# Altium PCB SmartSensorMainPhase.PcbDoc
Units mil, origin at the board's own origin, x right, y up, seen from the top; angles counter-clockwise.
Board outline 2362.2 x 1496.06 mil, 3 copper layers (Top Layer, Mid-Layer 1, Bottom Layer); 69 components, 50 nets, 240 pads, 60 vias.
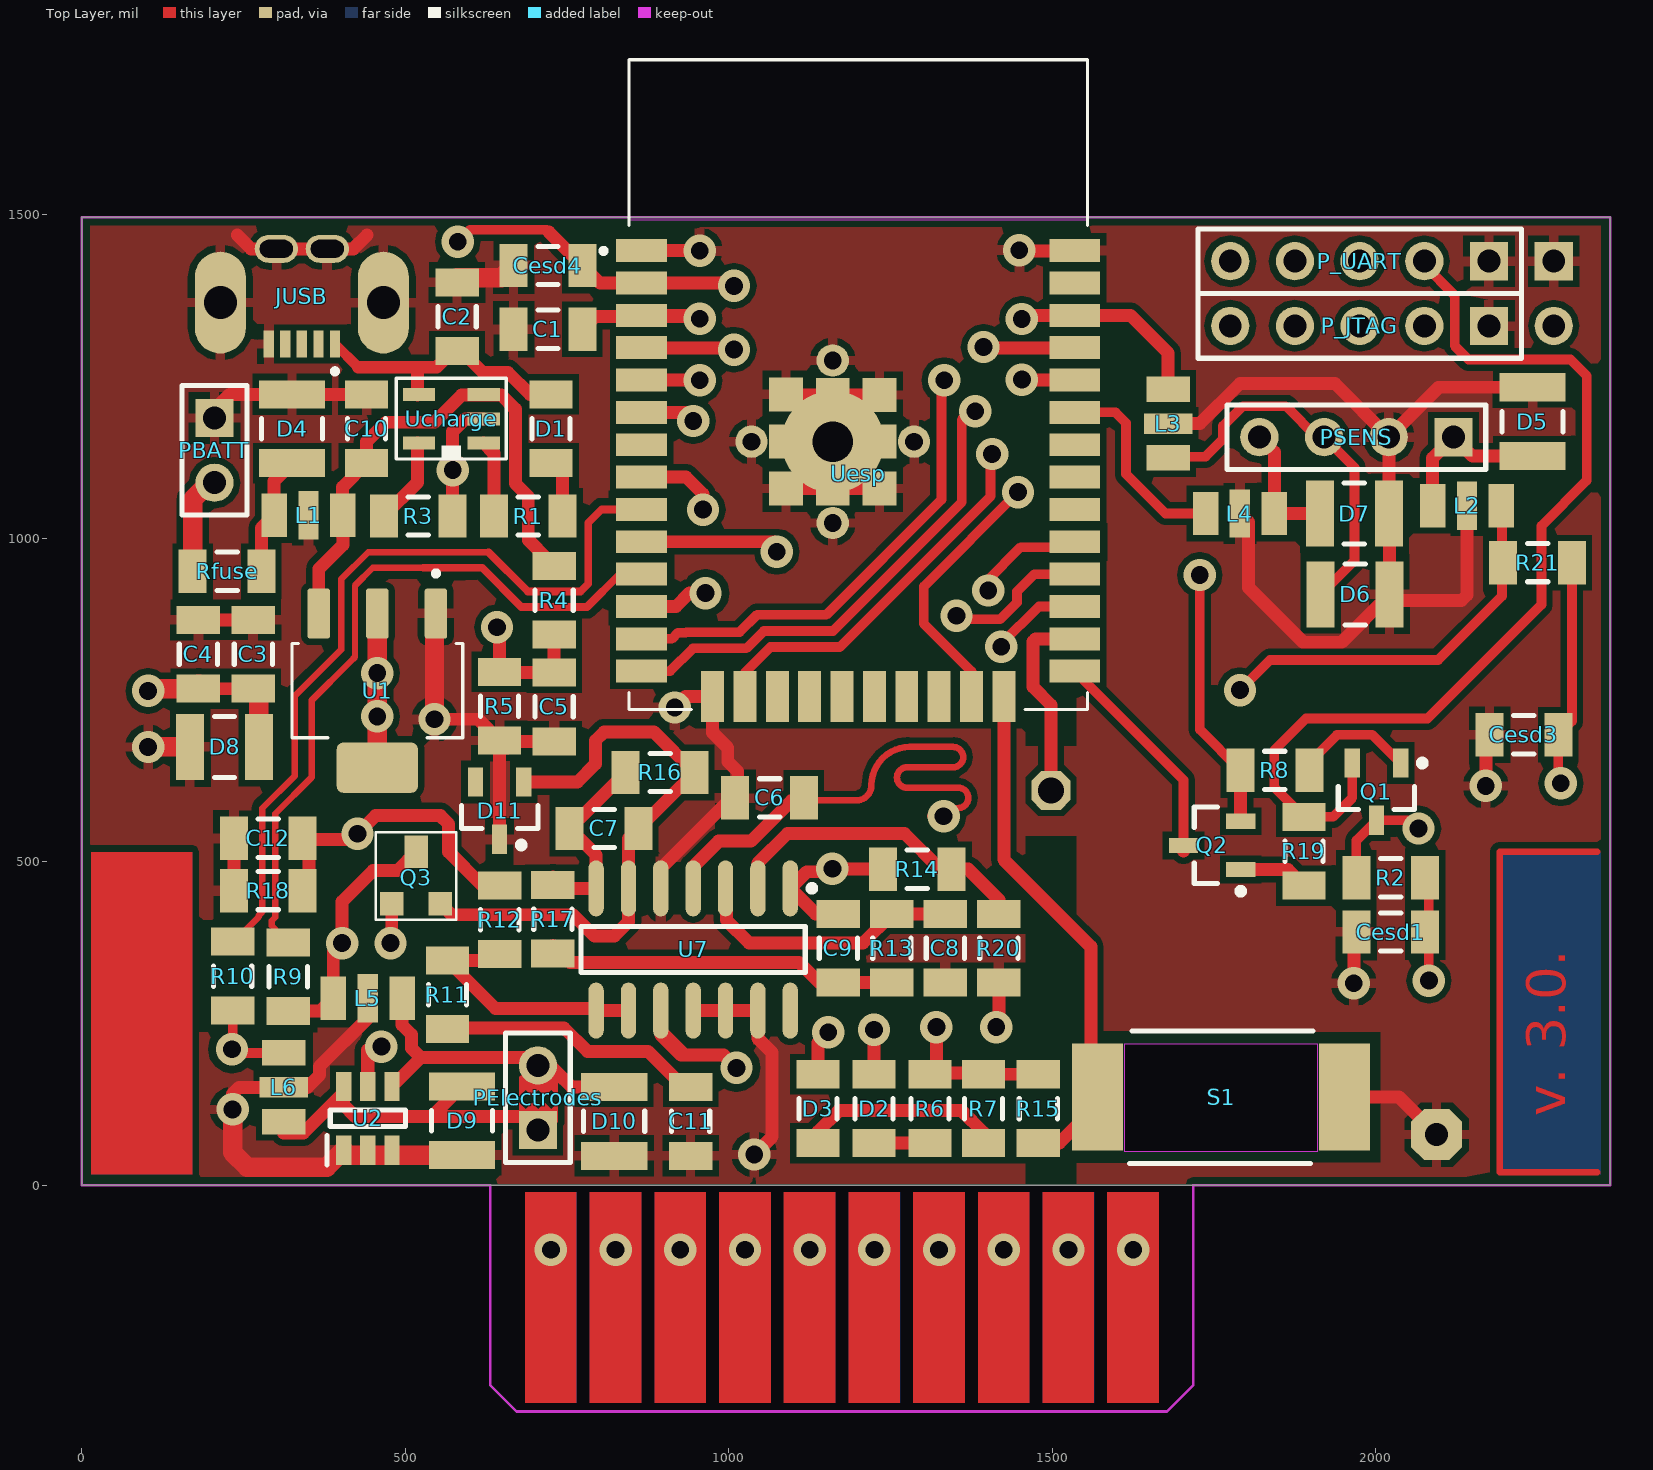
[diagram p0: Top Layer view]
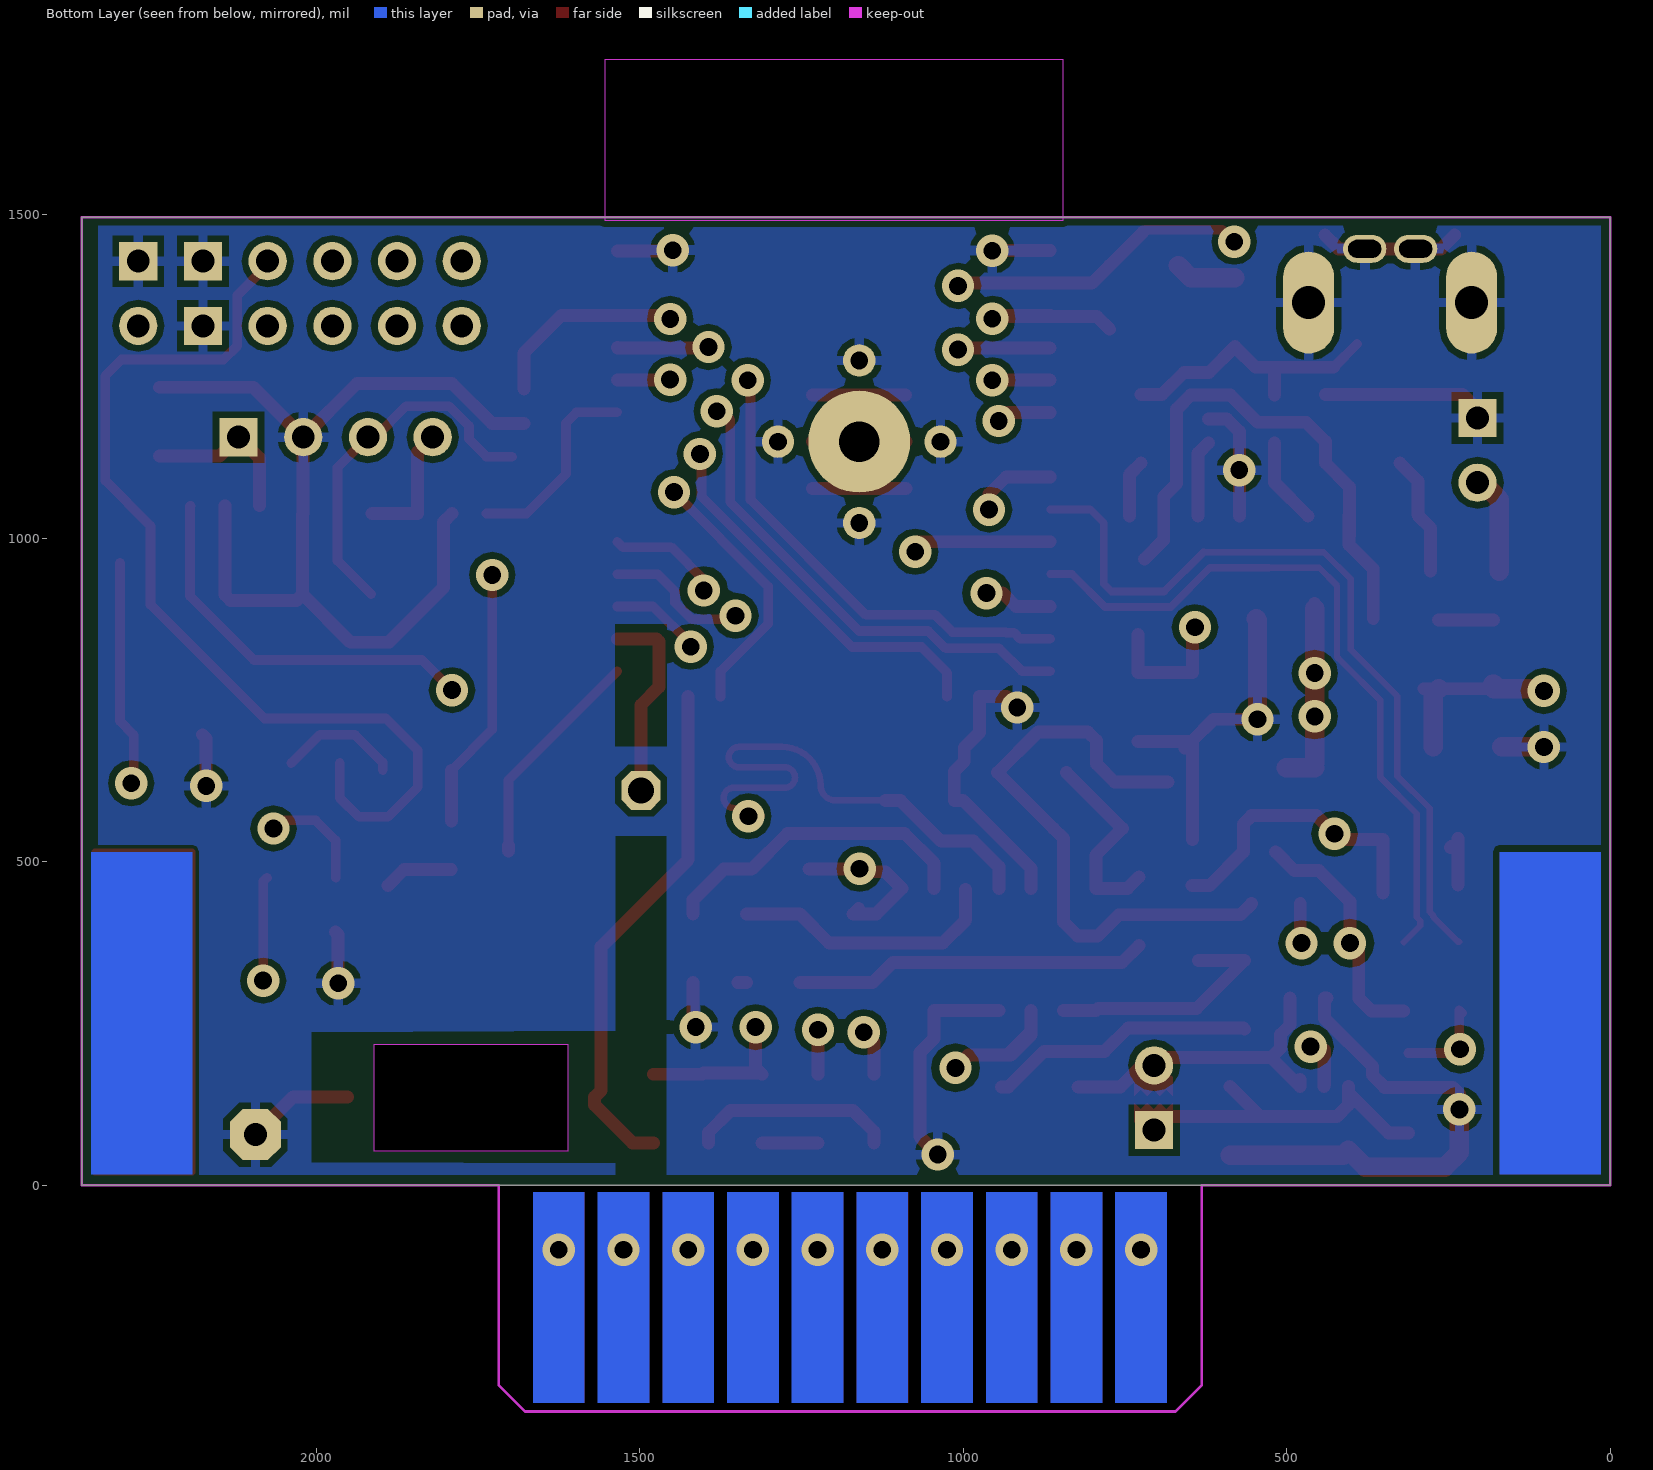
[diagram p1: Bottom Layer view, seen from below]
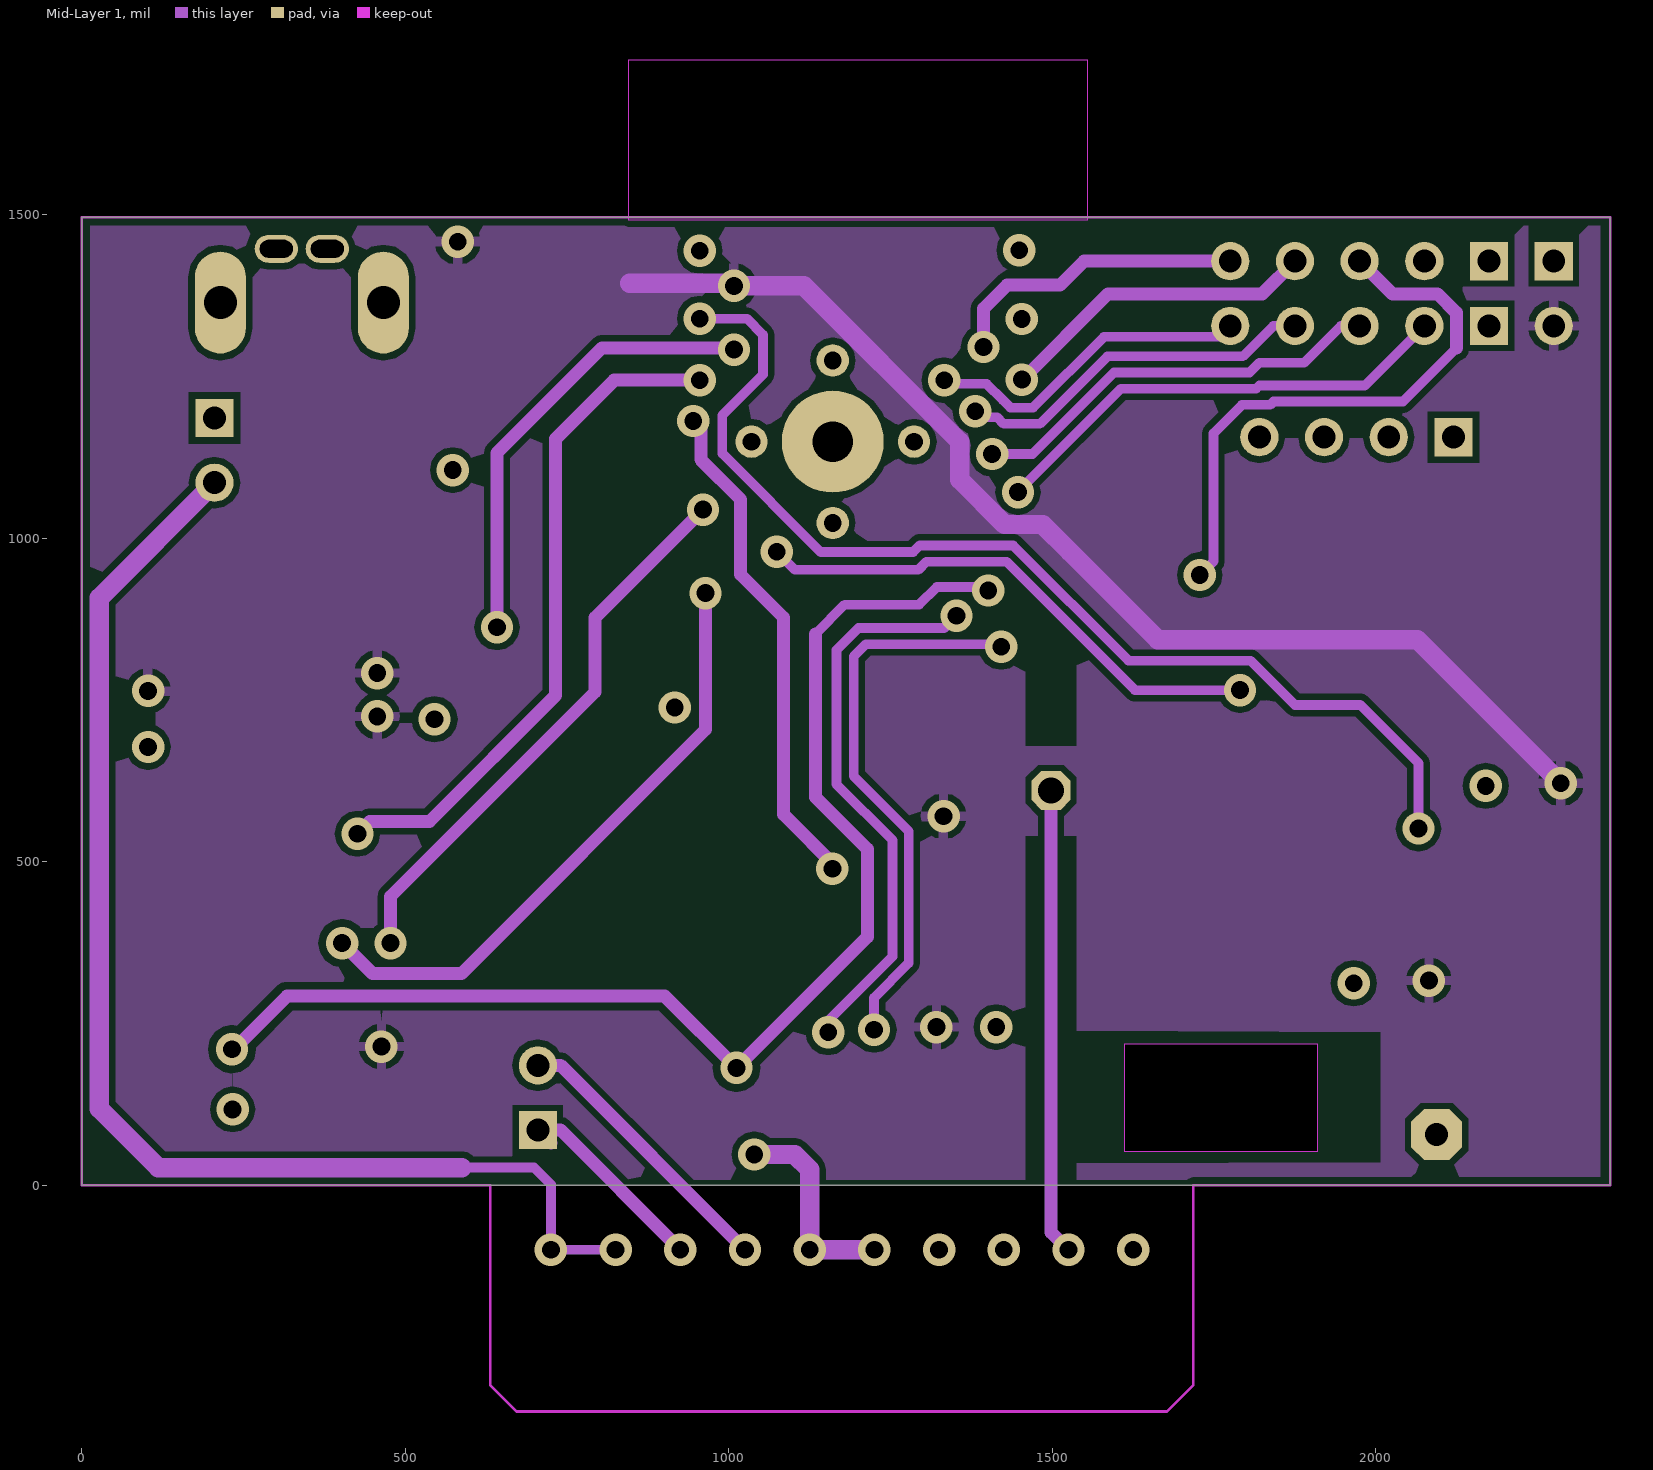
[diagram p2: Mid-Layer 1]

## Layer stack, top to bottom
Top Layer: signal copper 1.4
Dielectric: core 12.6, FR-4, Dk 4.8
Mid-Layer 1: signal copper 1.4
Dielectric: prepreg 12.6, FR-4, Dk 4.8
Bottom Layer: signal copper 1.4

## Board outline
0,0 2362.2,0 2362.2,1496.06 0,1496.06
cut-out: 1611.22,217.52 1611.22,52.17 1910.43,52.17 1910.43,217.52

## Design rules (kind name [scope] priority, off if disabled: settings)
Clearance Clearance_ACMM [(InNet('EL1') OR InNet('EL2') OR InNet('ACMM_VEL1') OR InNet('ACMM_VEL2')) vs NOT(InNet('EL1') OR InNet('EL2') OR InNet('ACMM_VEL1') OR InNet('ACMM_VEL2'))] p1: gap=12
Clearance Clearance_3 [InComponent('S1')] p2: gap=0
Clearance Clearance_2 [InComponent('Uopa') vs InComponent('Uopa')] p3: gap=8
Clearance Clearance_1 [InComponent('JUSB') vs InComponent('JUSB')] p4: gap=8
Clearance [All] p5: gap=10
HoleSize [All] p1: absolutevalues=TRUE maxlimit=200 minlimit=1 maxpercent=80.000 minpercent=20.000
MinimumSolderMaskSliver [All And Not InComponent('JUSB') vs All And Not InComponent('JUSB')] p1: minsoldermaskwidth=8
PolygonConnect [All] p1: connectstyle=Relief reliefconductorwidth=15 reliefentries=4 polygonreliefangle="90 Angle"
RoutingVias [All] p1: holewidth=27.56 width=50 viastyle="Through Hole" minholewidth=27.56 minwidth=50 maxholewidth=27.56 maxwidth=50
SilkscreenOverComponentPads [All] p1: minsilkscreentomaskgap=10
SolderMaskExpansion [All] p1: expansion=2
Width [All] p1: maxlimit=30 minlimit=10 preferedwidth=15
25 further rules are at their usual default settings.

## Components (designator, comment, footprint, x,y, rotation, side; value= is the part's Value field where it differs from the comment)
C1 "Cap" C1206 720.47,1322.83 r0 top
C2 "Cap Pol3" C1206 580,1342 r90 top
C3 "Cap Pol3" C1206 265,820.32 r90 top
C4 "Cap" C1206 180,820.32 r270 top
C5 "Cap" C1206 730,739.06 r90 top
C6 "Cap" C1206 1062.99,598.43 r0 top
C7 "Cap" C1206 807.09,551.18 r0 top
C8 "Cap" C1206 1334.65,366.14 r90 top
C9 "Cap" C1206 1169.29,366.14 r90 top
C10 "Cap Pol3" c1206 440,1169.06 r90 top
C11 "Cap" C1206 940.94,98.43 r90 top
C12 "Cap" C1206 288,536 r0 top
Cesd1 "Cap" C1206 2023,391 r0 top
Cesd3 "Cap" C1206 2229,696 r0 top
Cesd4 "Cap" C1206 720.47,1421.26 r0 top
D1 "LED RED" C1206 725,1169.06 r270 top
D2 "LED RED" C1206 1224.41,118.11 r90 top locked
D3 "LED GREEN" C1206 1137.8,118.11 r90 top locked
D4 "SD05TCT" C1210 325,1169.06 r270 top
D5 "SM2T3V3A" C1210 2242,1180 r270 top
D6 "UCLAMP3301D.TCT" C1210 1968,913 r180 top
D7 "UCLAMP3301D.TCT" C1210 1967,1038 r180 top
D8 "SM2T3V3A" C1210 220.47,677.17 r0 top
D9 "UCLAMP3301D.TCT" C1210 587.6,99.41 r90 top
D10 "UCLAMP3301D.TCT" C1210 822.83,98.43 r90 top
D11 "BAT54" SOT23_N 645.67,578.74 r270 top
JUSB "10118192-0001LF" GCT_USB3190_REVA2 340,1364.06 r0 top
L1 "NFW31SP106X1E4L" "1206 CLC emifil" 350.39,1035.43 r0 top
L2 "NFW31SP106X1E4L" "1206 CLC emifil" 2141,1050 r180 top
L3 "NFW31SP106X1E4L" "1206 CLC emifil" 1679,1177 r270 top
L4 "NFW31SP106X1E4L" "1206 CLC emifil" 1790,1038 r0 top
L5 "NFW31SP106X1E4L" "1206 CLC emifil" 441.73,288.94 r180 top
L6 "NFW31SP106X1E4L" "1206 CLC emifil" 312,151 r90 top
P_JTAG "Header 5" HDR1X5 2175,1328 r180 top
P_UART "Header 5" HDR1X5 2175,1428 r180 top
PBATT "Header 2" HDR1X2 204.97,1185.6 r270 top
PElectrodes "Header 2" HDR1X2 704.88,84.96 r90 top
PSENS "Header 4" HDR1X4 2120,1156 r180 top
Q1 "NPN" SOT-23B_N 2001,608 r270 top
Q2 "NPN" SOT-23B_N 1747,525 r180 top
Q3 "2N7002" SOT23-GDS 479,435 r90 top
R1 "Res2" C1206 690,1034.06 r0 top
R2 "Res2" C1206 2023,475 r0 top
R3 "Res2" C1206 520,1034.06 r180 top
R4 "Res2" C1206 730,904.06 r90 top
R5 "Res2" C1206 645.67,740.16 r90 top
R6 "Res2" C1206 1311.02,118.11 r270 top
R7 "Res2" C1206 1393.7,118.11 r270 top
R8 "Res2" C1206 1844,641 r180 top
R9 "Res2" C1206 319,322 r90 top
R10 "Res2" C1206 233,323 r90 top
R11 "Res2" C1206 565,294 r90 top
R12 "Res2" C1206 646,410 r270 top
R13 "Res2" C1206 1251.97,366.14 r270 top
R14 "Res2" C1206 1291.34,488.19 r0 top
R15 "Res2" C1206 1478.35,118.11 r90 top
R16 "Res2" C1206 893.7,637.8 r0 top
R17 "Res2" C1206 728,411 r90 top
R18 "Res2" C1206 288,455 r0 top
R19 "Res2" C1206 1889,516 r90 top
R20 "Res2" C1206 1417.32,366.14 r270 top
R21 "Res2" c1206 2250,962 r0 top
Rfuse "Res2" C1206 224.41,948.82 r180 top
S1 "VBS030600" VBS030600 1760.83,135.83 r0 top
U1 "ADP3338AKCZ-3.3RL7" SOT230P700X180-4N 456.69,764.21 r270 top
U2 "SRV05-4.TCT" SOT95P280X145-6N 442,103 r90 top
U7 "OPA4364AID" SO-14_N 944.88,364.17 r270 top
Ucharge "MCP73831T-2ACI/OT" SOT23-5 621,1147.06 r180 top
Uesp "ESP32-WROOM-32" MODULE_ESP32-WROOM-32 1200,1237.2 r0 top

## Footprints (in the part's own frame and the unit in brackets; to place one, negate y for a bottom-side part, rotate by r counter-clockwise, add the part's x,y. Pads: shape width x height; smd on the part's side, far side on the other; paste and mask are expansions set on the pad)
"1206 CLC emifil" [mm] "1206 shape 3 pin CLC EMIFIL chip, e.g. NFW31SP series"
  rect 1x1.7 smd: 1(-1.35,0) 3(1.35,0)
  rect 0.8x1.9 smd: 2(0,0)
  body extent -1.7,-0.9 1.7,0.9, height 2
C1206 [mm] "Chip Capacitor, Body 3.2x1.6mm, IPC High Density"
  rect 1.1x1.7 smd: 1(-1.35,0) 2(1.35,0)
  silkscreen extent -0.4,-0.75 0.4,0.75, body extent -1.7,-0.9 1.7,0.9, height 1.3
c1206 [mm] "Chip Capacitor, Body 3.2x1.6mm, IPC High Density"
  rect 1.1x1.7 smd: 1(-1.35,0) 2(1.35,0)
  silkscreen extent -0.4,-0.75 0.4,0.75, body extent -1.7,-0.9 1.7,0.9, height 1.3
C1210 [mm] "Chip Capacitor, Body 3.2x2.5mm, IPC High Density"
  rect 1.1x2.6 smd: 1(-1.35,0) 2(1.35,0)
  silkscreen extent -0.4,-1.2 0.4,1.2, body extent -1.7,-1.35 1.7,1.35, height 1.3
GCT_USB3190_REVA2 [mm]
  rect 0.4x1.05 smd mask+0: 1(1.3,-1.625) 2(0.65,-1.625) 3(0,-1.625) 4(-0.65,-1.625) 5(-1.3,-1.625)
  oval 2x4 hole 1.3: S1(-3.2,0) S2(3.2,0)
  oval 1.7x1.1 hole 0.7 slot 1.3 at 0 deg: S3(-1,2.11) S4(1,2.11)
  silkscreen extent 1.2,-2.8 1.4,-2.6
HDR1X2 [mm] "Connector; Header; 2 Position"
  rect 1.5x1.5 hole 0.9: 1(0,0)
  round 1.5 hole 0.9: 2(2.54,0)
  silkscreen extent -1.27,-1.27 3.81,1.27
HDR1X4 [mm] "Connector; Header; 4 Position"
  rect 1.5x1.5 hole 0.9: 1(0,0)
  round 1.5 hole 0.9: 2(2.54,0) 3(5.08,0) 4(7.62,0)
  silkscreen extent -1.27,-1.27 8.89,1.27
HDR1X5 [mm] "Connector; Header; 5 Position"
  rect 1.5x1.5 hole 0.9: 1(0,0)
  round 1.5 hole 0.9: 2(2.54,0) 3(5.08,0) 4(7.62,0) 5(10.16,0)
  silkscreen extent -1.27,-1.27 11.43,1.27
MODULE_ESP32-WROOM-32 [mm]
  rect 2x0.9 smd: 1(-8.5,5.26) 2(-8.5,3.99) 3(-8.5,2.72) 4(-8.5,1.45) 5(-8.5,0.18) 6(-8.5,-1.09) 7(-8.5,-2.36) 8(-8.5,-3.63) 9(-8.5,-4.9) 10(-8.5,-6.17) 11(-8.5,-7.44) 12(-8.5,-8.71) 13(-8.5,-9.98) 14(-8.5,-11.25) 25(8.5,-11.25) 26(8.5,-9.98) 27(8.5,-8.71) 28(8.5,-7.44) 29(8.5,-6.17) 30(8.5,-4.9) 31(8.5,-3.63) 32(8.5,-2.36) 33(8.5,-1.09) 34(8.5,0.18) 35(8.5,1.45) 36(8.5,2.72) 37(8.5,3.99) 38(8.5,5.26)
  rect 0.9x2 smd: 15(-5.715,-12.25) 16(-4.445,-12.25) 17(-3.175,-12.25) 18(-1.905,-12.25) 19(-0.635,-12.25) 20(0.635,-12.25) 21(1.905,-12.25) 22(3.175,-12.25) 23(4.445,-12.25) 24(5.715,-12.25)
  rect 1.33x1.33 smd: 39_1(-2.835,-0.381) 39_2(-1,-0.405) 39_3(0.835,-0.405) 39_4(-2.835,-2.24) 39_5(-1,-2.24) 39_6(0.835,-2.24) 39_7(-2.835,-4.075) 39_8(-1,-4.075) 39_9(0.835,-4.075)
  round 1.27 hole 0.7: 39_10(-4.191,-2.24) 39_10(-1,-5.431) 39_10(-1,0.951) 39_10(2.191,-2.24)
  Keep-Out Layer region: 9,6.45 -9,6.45 -9,12.75 9,12.75
  Keep-Out Layer region: 9,6.45 -9,6.45 -9,12.75 9,12.75
  silkscreen extent -10.1,-12.75 9,12.75
SO-14_N [mm] "SOIC, 14-Leads, Body 8.7x3.9mm, Pitch 1.27mm, IPC Medium Density"
  oval 2.2x0.6 smd: 1(-2.4,3.81) 2(-2.4,2.54) 3(-2.4,1.27) 4(-2.4,0) 5(-2.4,-1.27) 6(-2.4,-2.54) 7(-2.4,-3.81) 8(2.4,-3.81) 9(2.4,-2.54) 10(2.4,-1.27) 11(2.4,0) 12(2.4,1.27) 13(2.4,2.54) 14(2.4,3.81)
  silkscreen extent -2.52,-4.4 0.9,4.79, body extent -1.95,-4.33 1.95,4.33, height 1.75
SOT23-5 [mil]
  rect 50x20 smd: 1(0,0) 2(0,-37) 3(0,-75) 4(100,-75) 5(100,0)
  silkscreen extent -35,-100 135,25, body extent 2,-95 98,20, height 52
SOT23-GDS [mil]
  rect 50x36 smd: D(80,-38)
  rect 36x36 smd: G(0,0) S(0,-75)
  silkscreen extent -25,-100 110,25, body extent -3,-95 94,20, height 41
SOT23_N [mm] "SOT23, 3-Leads, Body 2.9x1.3mm, Pitch 0.95mm, Lead Span 2.3mm - Reverse Pinning, IPC Medium Density"
  rect 1.15x0.6 smd: 1(1.125,0) 2(-1.125,-0.95) 3(-1.125,0.95)
  silkscreen extent -0.2,-1.5 1.47,1.5, body extent -0.7,-1.5 0.7,1.5, height 1.1
SOT95P280X145-6N [mm]
  rect 1.15x0.6 smd: 1(-1.25,0.95) 2(-1.25,0) 3(-1.25,-0.95) 4(1.25,-0.95) 5(1.25,0) 6(1.25,0.95)
  silkscreen extent -1.83,-1.48 0.33,1.6
SOT230P700X180-4N [mm]
  rrect25% 1.97x0.89 smd: 1(-3.025,2.3) 2(-3.025,0) 3(-3.025,-2.3)
  rrect25% 1.97x3.19 smd: 4(3.025,0)
  silkscreen extent -4.7,-3.35 1.85,3.35
SOT-23B_N [mm] "SOT23, 3-Leads, Body 2.9x1.3mm, Pitch 0.95mm, Lead Span 2.4mm, IPC Medium Density"
  rect 1.15x0.6 smd: 1(-1.125,0.95) 2(-1.125,-0.95) 3(1.125,0)
  silkscreen extent -1.25,-1.5 0.7,1.93, body extent -0.7,-1.5 0.7,1.5, height 1.14
VBS030600 [mm]
  rect 2x4.2 smd: 1(-4.85,0) 2(4.85,0)
  silkscreen extent -3.6,-2.6 3.6,2.6

## Part data
C1 C4 C5 C6 C7 C8 C9 C11 C12 Cesd1 Cesd3 Cesd4: "MLCC Capacitor"
C2 C3 C10: "Polarized Capacitor (Surface Mount)"
D1 D2 D3: library part LED2
D4: library part "D Zener", "TVS diode, no latch-up, Vstand-off > 4.5V"
D5 D8: library part "D Zener", "TVS Diode, Vstand-off >=3V3, no latch-up"
D6 D7 D9 D10: library part "D Zener", "TVS diode, Vstand-off >= 3V3, low capacitance, can have latch-up"
D11: library part "D Zener", "Zener Diode, super low capacitance"
JUSB: library part USB3190_REVA2, "microUSB connector"
L1 L2 L3 L4 L5 L6: library part CLCemi, "CLCemi"
P_JTAG P_UART: "Header, 5-Pin"
PBATT PElectrodes: "Header, 2-Pin"
PSENS: "Header, 4-Pin"
Q1 Q2: library part QNPN, "NPN Bipolar Transistor"
Q3: library part 2N7002-SOT23, "N CHANNEL MOSFET 2N7002 SOT23"
R1 R2 R3 R6 R7 R8 R9 R10 R11 R12 R15 R18 R19 R21 Rfuse: "Resistor 5%"
R4 R5 R13 R14 R16 R17 R20: "Resistor 1%"
S1: "Movement sensor"
U1: library part ADP3338AKCZ-5-R7, "LDO voltage regulator"
U2: "17.5V Clamp 12A _8/20µs_ Ipp Tvs Diode Surface Mount SOT-23-6"
U7: library part AD704AN, "Quad Picoampere Input Current Bipolar Operational Amplifier"
Ucharge: "Charger IC Lithium Ion/Polymer SOT-23-5"
Uesp: "Bluetooth, WiFi Transceiver Module 2.4GHz ~ 2.5GHz Surface Mount"

## Free pads (board coordinates)
  round 157.48 hole 62.99: 0(1160.63,1149.02)
  oct 60x60 hole 40: 0(1498,610)
  oct 78.74x78.74 hole 35.43: 0(2094,78)
  rect 15x15 smd: 1(704.96,84.76) 2(705.79,185.2)
  rect 59.06x59.06 hole 35.43: 1(2275,1428)
  round 59.06 hole 35.43: 2(2275,1328)

## Via types
v1: diameter 50, hole 27.56, Top Layer to Bottom Layer, 60 vias

## Nets (pads, with @x,y where several pads share a name; then routed paths per layer and width w, separated by ;. In a path a pad name is that pad's centre, name@x,y a point inside that pad or via, vN(x,y) a via of type N, cw(c..) or ccw(c..) an arc to the next point about the centre after c; other vN are vias at no path point)
ACMM_IN: C12.2 R12.1 R18.2 Uesp.5 | length 1603.7
  Top Layer w20: R18.2@351.03,451.76 351.03,534.43 417.43,534.43 v1(426,543) 454,571 554,571 567,558 567,515 618.85,463.15 R12.1 ; Uesp.5@865.59,1244.06 v1(955,1244.06)
  Mid-Layer 1 w20: v1(426,543) 445,562 537.28,562 732.28,757 732.28,1153.54 822.8,1244.06 v1(955,1244.06)
ACMM_VEL1: R10.2 Uesp.9 | length 1245.4
  Top Layer w10: R10.2 235.16,376.15 273.5,414.49 273.5,416.65 279,422.15 279,582.28 329,632.28 329,755.87 400.66,827.53 400.66,936.16 442.5,978 628.63,978
  Top Layer w12: 628.63,978 689.08,917.55 770.92,917.55 782.8,929.43 782.8,1023.5 803.59,1044.29 Uesp.9
ACMM_VEL2: R9.2 Uesp.11 | length 1115.9
  Top Layer w10: R9.2 293.5,400.65 293.5,408.37 299,413.87 299,574 355,630 355,749.04 414.69,808.74 422.17,816.22 422.17,926.56 449.61,954 528,954
  Top Layer w12: 528,954 618.69,954 679.14,893.55 780.86,893.55 831.6,944.29 Uesp.11
BATTMEAS: C5.2 R4.1 R5.2 Uesp.4 | length 1046.4
  Top Layer w20: v1(641.73,862.2) 645.67,862.2 R5.2 645.67,792.2 C5.2 R4.1 ; Uesp.4@865.59,1294.06 v1@1000,1294.06
  Mid-Layer 1 w20: v1(641.73,862.2) 641.73,1131.73 804.06,1294.06 v1@1000,1294.06
  other v1: 1007.87,1291.34
DTR: P_UART.3 Q2.2 R8.2 | length 1301.3
  Top Layer w15: v1(1728,943) 1728,703.85 R8.2
  Top Layer w20: Q2.2@1790.85,562.84 R8.2
  Mid-Layer 1 w15: v1(1728,943) 1749,964 1749,1162 1792.97,1205.97 1836.97,1205.97 1842,1211 2042,1211 2124.53,1293.53
  Mid-Layer 1 w20: P_UART.3 2025.47,1377.53 2095.51,1377.53 2124.53,1348.51 2124.53,1293.53
EL1: L6.3 R10.1 U7.10 Uesp.29 | length 2500.1
  Top Layer w15: R10.1@229,265.85 R10.1 v1@233,211 ; v1@239.85,204.15 L6.3 ; v1(1401,919) 1401,925 1392,934 1399,934 1451,986 1526.35,986 Uesp.29
  Top Layer w20: U7.10 U7.10@894.88,235.35 ; v1(1011.81,181.1) 992.13,200.79 929.45,200.79 ; U7.10@894.88,235.35 894.88,232.12 926.21,200.79 929.45,200.79 ; U7.10@894.88,235.35 895.4,234.83 897.66,234.83 929.45,203.05 929.45,200.79
  Mid-Layer 1 w15: 1134,852 1179,897 1294,897 1321.5,924.5 1395.5,924.5 v1(1401,919)
  Mid-Layer 1 w20: v1(232,210) 232,207 317,292 900.91,292 v1(1011.81,181.1) 1214.29,383.58 1214.29,519.11 1134,599.4 1134,852
EL2: L5.3 Q3.D R9.1 Uesp.12 | length 1435.1
  Top Layer w20: R9.1 368.5,268.85 L5.3 388.58,360.16 v1(402.32,373.9) 402.32,438.32 450,486 488,486 Q3.D ; Uesp.12 918.29,894.29 939,915 v1(964,915)
  Mid-Layer 1 w20: v1(402.32,373.9) 449.45,326.77 586.77,326.77 964,704 v1(964,915)
EN: C1.2 Q1.3 R2.1 Uesp.3 | length 2142.8
  Top Layer w15: R2.1 1969.85,532.56 Q1.3 2053.29,563.71 v1(2066,551)
  Top Layer w20: C1.2 793.31,1342.52 947.99,1342.52 949.76,1344.29 Uesp.3
  Mid-Layer 1 w15: v1(955,1339.06) 1027.94,1339.06 1052.87,1314.13 1052.87,1252.87 990,1190 990,1130.38 1141.99,978.39 1284.92,978.39 1295.04,988.5 1439.5,988.5 1617.5,810.5 1806.5,810.5 1875,742 1976,742 2066,652 v1(2066,551)
GND: C1.1 C2.2 C3.2 C4.1 C5.1 C6.1 C8.1 C10.2 C11.1 C12.1 Cesd1.1 Cesd3.1 Cesd4.1 D4.1 D5.1 D6.1 D7.1 D8.1 D9.1 D10.1 D11.1 JUSB.5 JUSB.S1 JUSB.S2 JUSB.S3 JUSB.S4 L1.2 L2.2 L3.2 L4.2 L5.2 L6.2 P_JTAG.1 P_UART.1 pad.0@1160.63,1149.02 pad.0@2094,78 pad.1@2275,1428 PBATT.1 PSENS.2 R3.1 R5.1 R18.1 R20.2 S1.2 U1.1 U2.1 U2.2 U2.3 U7.5 U7.11 U7.12 U7.13 Ucharge.2 Uesp.1 Uesp.15 Uesp.38 Uesp.39_1 Uesp.39_2 Uesp.39_3 Uesp.39_4 Uesp.39_5 Uesp.39_6 Uesp.39_7 Uesp.39_8 Uesp.39_9 Uesp.39_10 | length 6085.3
  Top Layer w20: C4.1 C3.2 ; PBATT.1@205,1199.06 228.15,1222.2 D4.1 C10.2 ; v1(233,117) 233,141 243,151 L6.2 348.58,151 367.46,169.89 367.46,183.56 441.73,257.82 L5.2 L5.2@437.76,288.94 ; R18.1@234.85,463.62 C12.1 ; 240.16,1468.5 261.54,1447.13 JUSB.S3 JUSB.S4 419.57,1447.13 440.94,1468.5 ; C12.1@244.73,524.13 C12.1@246.83,522.03 ; v1(545,720) 612.68,720 R5.1 ; R3.1 v1(573.15,1105) 573.15,1164.78 592.43,1184.06 Ucharge.2 ; D11.1 R5.1 ; R5.1@657.48,675.2 R5.1@646.77,685.91 ; C5.1 R5.1@646.77,685.91 ; Uesp.1 v1@954.76,1444.29 ; U7.5 894.88,489.37 1000,594.49 1013.78,594.49 1013.78,639.12 998.31,654.59 998.31,675.8 975,699.11 Uesp.15 933.07,754.92 v1(916.34,738.19) ; U7.11 U7.12 U7.13 1044.88,226.77 1066.93,204.72 1066.93,74.8 v1(1039.37,47.24) ; Uesp.39_7 Uesp.39_8 ; Uesp.39_4 Uesp.39_5 ; Uesp.39_1@1089.33,1221.26 Uesp.39_2 ; Uesp.39_9 Uesp.39_8 ; Uesp.39_6 Uesp.39_5 ; Uesp.39_3 Uesp.39_2 ; C8.1 C8.1@1348.43,312.99 ; v1(1413.39,244.09) 1417.32,248.03 R20.2 ; v1@1455,1444.06 Uesp.38@1534.41,1444.06 ; L3.2 1728,1177 1790,1239 1937,1239 PSENS.2 ; L4.2 1803.46,1024.54 1803.46,923.27 1887.73,839 1947.15,839 D6.1 ; S1.2 2036.17,135.83 pad.0@2094,78 ; v1(1966,312) 1966,387.15 Cesd1.1 ; L2.2 2141,912 2132.54,903.54 2030.61,903.54 D6.1 ; v1(2170,617) 2170,690.15 Cesd3.1 ; D5.1 2097.15,1233.15 PSENS.2 ; R5.1 R5.1@646.77,685.91 ; Uesp.39_8 Uesp.39_5 ; Uesp.39_5 Uesp.39_2 ; PSENS.2 2020.15,1155.85 D7.1 2021.15,1037 D6.1
  Top Layer w30: v1(102.36,677.17) D8.1 ; v1(233,117) 233,50.46 255.91,27.56 378.37,27.56 U2.1 412.13,46.26 479.4,46.26 D9.1 ; v1(545,720) 545,873.19 U1.1@547.24,875.43 ; C2.2@580,1402.2 648.27,1402.2 Cesd4.1
  Mid-Layer 1 w30: v1(1039.37,47.24) 1101.76,47.24 1125,24 v1(1125,-100) v1(1225,-100)
  other v1: 955,1444.06 1448.82,1444.88
IO0: Q2.3 Uesp.25 | length 347.4
  Top Layer w15: Uesp.25 1702.71,626.23 Q2.3
  Top Layer w20: Q2.3@1702.71,516.51 Q2.3
LEDG: D3.2 Uesp.28 | length 1170.5
  Top Layer w15: v1(1352,880) 1357.5,874.5 1419.43,874.5 1445.5,900.57 1445.5,917.5 1472.29,944.29 Uesp.28
  Top Layer w20: D3.2 1137.8,220.47 v1(1153.54,236.22)
  Mid-Layer 1 w15: v1(1153.54,236.22) 1153.54,253.9 1253,353.36 1253,533 1166.5,619.5 1166.5,827 1200.5,861 1333,861 v1(1352,880)
LEDR: D2.2 Uesp.27 | length 1084.8
  Top Layer w15: v1(1421,832) 1421,836 1479.29,894.29 Uesp.27
  Top Layer w20: D2.2 v1(1224.41,240.16)
  Mid-Layer 1 w15: v1(1224.41,240.16) 1224.41,289.41 1278,343 1278,547 1193,632 1193,817 1212,836 1421,836 v1(1421,832)
NetC2_1: C2.1 D1.1 JUSB.1 Ucharge.4 | length 435.9
  Top Layer w15: JUSB.1 427.2,1264.06
  Top Layer w20: 427.2,1264.06 520,1264.06 ; Ucharge.4@519,1221.06 519,1263.06 520,1264.06 ; D1.1 692.52,1222.2 658.82,1255.91 620,1255.91 580,1295.91 548.15,1264.06 520,1264.06
NetC7_1: C7.1 R16.1 R17.2 U7.7 | length 305.8
  Top Layer w20: R17.2@728.35,476.38 746.06,458.66 U7.7 794.88,510.24 C7.1 R16.1
NetC7_2: C7.2 D11.3 Q3.S R16.2 U7.6 | length 936.3
  Top Layer w20: Q3.S 571.2,417.8 759.26,417.8 792.06,385 823,385 844.88,406.88 U7.6 844.88,535.83 C7.2 R16.2 884.65,700 807,700 794,687 794,651 766.03,623.03 D11.3
NetC8_2: C8.2 R13.1 U7.3 | length 419.7
  Top Layer w20: U7.3@996.06,456.69 996.06,409.45 1031.5,374.02 1207.42,374.02 1251.97,418.57 R13.1 C8.2
NetC9_1: C9.1 R13.2 R17.1 | length 547.3
  Top Layer w20: R17.1@728.35,370.08 754.41,344.02 1108.74,344.02 1139.76,312.99 C9.1 R13.2
NetC10_1: C10.1 L1.3 R4.2 U1.3 Ucharge.3 | length 858.1
  Top Layer w20: U1.3@366.14,875.43 U1.3 366.14,952.14 403.54,989.54 L1.3@403.54,1003.54 ; L1.3 L1.3@403.54,1003.54 ; R4.2@719.44,967.77 690,997.2 690,1064.31 670,1084.31 670,1199.34 648.28,1221.06 587,1221.06 545,1179.06 470,1179.06 440,1149.06 C10.1 403.15,1079.06 403.15,1003.15 L1.3@403.54,1003.54
NetC11_2: C11.2 R11.1 | length 414.6
  Top Layer w20: R11.1 567,242.85 745.23,242.85 781.71,206.38 875.37,206.38 930.17,151.57 C11.2
NetD1_2: D1.2 R1.2 | length 89.4
  Top Layer w20: D1.2 743.15,1097.76 R1.2
NetD2_1: D2.1 R6.2 | length 86.6
  Top Layer w20: D2.1 R6.2
NetD3_1: D3.1 R7.2 | length 317.4
  Top Layer w20: D3.1 1137.8,82.8 1170,115 1360,115 1393.7,81.3 R7.2
NetD4_2: D4.2 L1.1 Rfuse.1 | length 186.7
  Top Layer w20: Rfuse.1 277.56,1015.75 L1.1 297.24,1088.15 D4.2
NetD5_2: D5.2 L2.3 PSENS.1 | length 253.4
  Top Layer w20: L2.3 2087.85,1123.85 PSENS.1 2149.15,1126.85 D5.2
NetD6_2: D6.2 L3.3 PSENS.3 | length 563.1
  Top Layer w15: L3.3@1697,1125.85 1736.82,1125.85 1763.97,1153 1763.97,1173.48 1794.49,1204 1861,1204 PSENS.3@1911,1154 ; D6.2 1967,965.15 1967,1109 PSENS.3
NetD7_2: D7.2 L4.3 PSENS.4 | length 198.3
  Top Layer w20: PSENS.4 1843.15,1132.85 L4.3 D7.2
NetD9_2: D9.2 L6.1 pad.1@704.96,84.76 PElectrodes.1 U2.6 | length 837.9
  Top Layer w20: L6.1@311.77,80.59 342.34,80.59 404.29,142.54 404.29,123.9 404.6,123.59 ; U2.6 404.6,123.59 ; D9.2 541.22,106.18 ; PElectrodes.1@677.28,106.18 541.22,106.18 ; PElectrodes.1 pad.1@705.83,84.02 ; 404.6,123.59 422.01,106.18 541.22,106.18
  Mid-Layer 1 w20: PElectrodes.1@725,64.84 PElectrodes.1 740.04,84.96 v1(925,-100)
NetD10_2: D10.2 L5.1 pad.2@705.79,185.2 PElectrodes.2 U2.4 | length 959.8
  Top Layer w20: U2.4@479.4,163.4 U2.4 524.19,197 ; L5.1 494.88,247.24 509.56,232.56 509.56,211.44 524,197 524.19,197 ; PElectrodes.2 pad.2@704.65,185.2 ; PElectrodes.2@710.63,172.83 735.79,172.83 ; D10.2 757.05,151.57 735.79,172.83 ; 524.19,197 692.84,197 pad.2@704.65,185.2 ; pad.2@704.65,185.2 705.79,185.2 723.43,185.2 735.79,172.83
  Mid-Layer 1 w20: PElectrodes.2 740.04,184.96 v1(1025,-100)
NetPBATT_2: PBATT.2 Rfuse.2 | length 2146.7
  Top Layer w30: Rfuse.2 171.26,1059.45 PBATT.2@204.72,1092.91
  Mid-Layer 1 w15: 587,27 699,27 725,1 v1(725,-100) v1(825,-100)
  Mid-Layer 1 w30: PBATT.2 27,907.62 27,118 118,27 587,27
NetQ1_1: Q1.1 R8.1 | length 189.3
  Top Layer w15: R8.1 1897.15,653.15 1940,696 1994.69,696 Q1.1
NetQ2_1: Q2.1 R19.1 | length 108
  Top Layer w20: Q2.1 1864.25,487.6 R19.1
NetR1_1: R1.1 Ucharge.1 | length 119.6
  Top Layer w20: Ucharge.1 636.85,1131.2 R1.1
NetR3_2: R3.2 Ucharge.5 | length 134.6
  Top Layer w20: R3.2 519,1086.2 Ucharge.5@519,1147.06
NetR11_2: R11.2 R12.2 U7.8 U7.9 | length 383.3
  Top Layer w20: R12.2@636.3,347.15 R11.2 639.3,272.85 791.72,272.85 U7.8 U7.9
NetR14_2: R14.2 R20.1 U7.2 | length 494.4
  Top Layer w20: U7.2 1044.88,497.64 1090.55,543.31 1271.65,543.31 1326.77,488.19 R14.2 1370.08,488.19 1417.32,440.94 R20.1
PH_TRANS_AMP_EN_PIN: Q3.G Uesp.8 | length 1061.4
  Top Layer w20: v1(477,374) 479,376 Q3.G ; Uesp.8 933.71,1094.29 960,1068 v1(960,1044)
  Mid-Layer 1 w20: v1(477,374) 477,446 793,762 793,877 v1(960,1044)
PHASE_IN: C9.2 R14.1 U7.1 Uesp.6 | length 1152.4
  Top Layer w20: Uesp.6 943.5,1194.29 956.69,1181.1 956.59,1181 v1(945,1181) ; C9.2@1161.42,427.17 C9.2 ; C9.2@1170.02,419.29 C9.2 ; R14.1 1169.29,488.19 1165.35,484.25 1120.47,484.25 U7.1 1134.25,419.29 C9.2
  Mid-Layer 1 w20: v1(945,1181) 956.69,1169.31 956.69,1121.26 1018,1059.95 1018,943.65 1084.48,877.17 1084.48,573 v1@1169.29,488.19
  other v1: 1160,489
RTS: P_UART.2 Q1.2 R19.2 | length 1525
  Top Layer w15: Q1.2 1963.6,598.6 1934.15,569.15 R19.2 1843,615.15 1843,672 1892,721 2080,721 2256,897 2256,1019 2326,1089 2326,1251 2301,1276 2143.2,1276 2122.03,1297.17 2122.03,1375.03 2075,1422.06 P_UART.2
RXD0: P_UART.4 Uesp.34 | length 581.4
  Top Layer w20: v1(1453,1245) 1453,1244.34 1452.76,1244.09 Uesp.34@1534.45,1244.09
  Mid-Layer 1 w20: v1(1453,1245) 1453,1244.34 1586.19,1377.53 1824.53,1377.53 P_UART.4
SCL: L3.1 Uesp.36 | length 308.6
  Top Layer w20: v1(1452.76,1338.58) 1458.46,1344.29 Uesp.36 1620.71,1344.29 1679,1286 L3.1
SDA: L4.1 Uesp.33 | length 313.2
  Top Layer w15: Uesp.33 1597.71,1194.29 1614,1178 1614,1099 1675,1038 L4.1
SENS_V: L2.1 R21.1 Uesp.10 | length 1635.3
  Top Layer w15: v1(1790,765) 1836.5,811.5 2096.5,811.5 2195.15,910.15 2195.15,1049 L2.1
  Top Layer w20: Uesp.10 1069.71,994.29 v1@1077,987
  Mid-Layer 1 w15: v1(1074,979) 1102.11,950.89 1292.78,950.89 1305.39,963.5 1429.14,963.5 1627.64,765 v1(1790,765)
TCK: P_JTAG.3 Uesp.16 | length 1246
  Top Layer w15: Uesp.16 1025,792 1064.5,831.5 1171.5,831.5 1404.5,1064.5 1404.5,1127.5 v1(1407,1130)
  Mid-Layer 1 w15: v1(1407,1130) 1469.48,1130 1595.45,1255.97 1804.83,1255.97 1819.74,1270.88 1888.88,1270.88 1946,1328 P_JTAG.3
TDI: P_JTAG.4 Uesp.14 | length 1333
  Top Layer w15: Uesp.14 909.29,794.29 944.5,829.5 1027.14,829.5 1054.14,856.5 1161.14,856.5 1360,1055.36 1360,1183 v1@1374,1197
  Mid-Layer 1 w15: v1(1381,1196) 1372,1187 1414.39,1187 1424.8,1176.59 1480.72,1176.59 1585.09,1280.97 1794.48,1280.97 1841.51,1328 P_JTAG.4
TDO: P_JTAG.2 Uesp.23 | length 1141.9
  Top Layer w15: Uesp.23 1375,794 1301.5,867.5 1301.5,925.5 v1(1447,1071)
  Mid-Layer 1 w15: v1(1447,1071) 1447,1072.17 1605.8,1230.97 1815.19,1230.97 1820.22,1236 1983,1236 P_JTAG.2
TMS: P_JTAG.5 Uesp.13 | length 1253.2
  Top Layer w15: Uesp.13 911.87,844.29 921.29,853.71 933.36,853.71 934.14,854.5 1016.79,854.5 1043.79,881.5 1150.79,881.5 1328.76,1059.47 1328.76,1234.24 1326,1237 v1(1333,1244)
  Mid-Layer 1 w15: v1(1333,1244) 1338.5,1238.5 1398.6,1238.5 1423.5,1213.6 1423.5,1213.25 1435.15,1201.59 1470.36,1201.59 1579.77,1311 1758,1311 P_JTAG.5
TP: pad.0@1498,610 Uesp.26 | length 1029.2
  Top Layer w20: pad.0@1498,610 1498,742 1470,770 1470,840 1474.29,844.29 Uesp.26
  Mid-Layer 1 w20: pad.0@1498,610 1498,-73 v1(1525,-100)
TXD0: P_UART.5 Uesp.35 | length 615.4
  Top Layer w20: v1(1393.7,1295.28) 1409.45,1295.28 1411.14,1293.58 1533.94,1293.58 Uesp.35
  Mid-Layer 1 w20: v1@1395.39,1293.58 v1(1393.7,1295.28) 1393.7,1354.7 1430,1391 1512,1391 1549,1428 P_UART.5
VDD: C3.1 C4.2 C6.2 Cesd1.2 Cesd3.2 Cesd4.2 D8.2 pad.2@2275,1328 R2.2 R6.1 R7.1 R15.2 R21.2 U1.2 U1.4 U2.5 U7.4 Uesp.2 | length 4566.9
  Top Layer w10: C6.2@1120.08,594.49 1196.85,594.49 ccw(c1196.85,618.11) 1220.47,618.11 cw(c1279.53,618.11) 1279.53,677.17 1346.46,677.17 cw(c1346.46,661.42) 1362.2,661.42 cw(c1346.46,661.42) 1346.46,645.67 1275.59,645.67 ccw(c1275.59,629.92) 1259.84,629.92 ccw(c1275.59,629.92) 1275.59,614.17 1354.33,614.17 cw(c1354.33,598.43) 1370.08,598.43 cw(c1354.33,598.43) 1354.33,582.68 1322.83,582.68 1311.02,570.87 1311.89,570 v1(1332,570)
  Top Layer w15: v1(581,1458) 599.56,1476.56 718.32,1476.56 722,1472.88 ; R2.2 2082,469.15 v1(2082,316) ; v1(2286,621) 2282.15,624.85 Cesd3.2 2303.15,717 R21.2
  Top Layer w20: C4.2 C3.1 C3.1@288.11,767.17 ; U2.5@441.69,155.39 v1@441.69,208.54 ; U2.5 442,198 ; U1.2@456.69,891.18 U1.2@456.69,899.06 ; 722,1472.88 Cesd4.2 800.59,1394.29 Uesp.2 991.54,1394.29 v1@996.06,1389.76 ; U7.4 944.88,492.13 984.25,531.5 1034.19,531.5 1097.18,594.49 C6.2@1120.08,594.49 ; R6.1 R6.1@1312.99,173.23 ; v1(1320.87,244.09) 1320.87,181.1 R6.1@1312.99,173.23 ; R15.2 1403.54,171.26 1401.57,173.23 R6.1@1312.99,173.23
  Top Layer w30: v1@105.75,767.17 C4.2 ; C4.2@180,774.06 C4.2@181.85,774.06 ; C3.1 273.62,758.54 D8.2 ; U1.4 U1.4@500.55,645.12 ; U1.4@456.69,652.99 v1(456.69,724.41) v1(456.69,791.34) U1.2 U1.2@456.69,891.18
  Mid-Layer 1 w30: 847,1394 1003.64,1394 v1(1007.87,1389.76) 1116.22,1389.76 1357,1148.99 1357,1090.29 1426.29,1021 1484.99,1021 1526.99,979 1662.99,843 2064,843 v1(2286,621)
  other v1: 463,214 102.36,763.78
WAKE: R15.1 S1.1 Uesp.24 | length 806.9
  Top Layer w20: Uesp.24 1425,503 1559.48,368.52 1559.48,146.22 S1.1 1569.88,124.02 1510.83,64.96 R15.1
pads on no net: D11.2 JUSB.2 JUSB.3 JUSB.4 U7.14 Uesp.7 Uesp.17 Uesp.18 Uesp.19 Uesp.20 Uesp.21 Uesp.22 Uesp.30 Uesp.31 Uesp.32 Uesp.37
copper on no net: | length 796.2
  Top Layer w10: 2342,20 2191.38,20 2191.38,515 2342,515
  other v1: 1325,-100 1425,-100 1625,-100

## Polygon pours and split planes (outlines as drawn)
VDD on Mid-Layer 1 "VDDpoly" (solid, remove dead copper, pour order 9): 12.29,1488.35 12.29,8.03 1992.61,8.03 2346.94,8.03 2346.94,571.02 2346.94,1488.35 2299.7,1488.35
GND on Top Layer "GNDpolyT" (solid, remove dead copper, pour order 17): 8.78,1486.34 8.78,2.09 587.52,2.09 2347.36,2.09 2347.36,37.52 2347.36,1486.34 2182.01,1486.34
GND on Bottom Layer "GNDpolyB" (solid, remove dead copper, pour order 15): 14.4,15.75 2337.23,15.75 2337.23,118.94 2337.23,1484.25 2242.74,1484.25 14.4,1484.25 14.4,1369.15

## Keep-outs
Keep-Out Layer:
  lines w4: 0,0 0,1496.06 2362.2,1496.06 2362.2,0 1771.65,0 1718,0 1718,-309 1677,-350 672,-350 631,-309 631,0 590.55,0 0,0

## Other copper
Top Layer:
  rectangle: 1584.8,-337 1664.8,-11
  rectangle net TP: 1484.8,-337 1564.8,-11
  rectangle: 1384.8,-337 1464.8,-11
  rectangle: 1284.8,-337 1364.8,-11
  rectangle net GND: 1184.8,-337 1264.8,-11
  rectangle net GND: 1084.8,-337 1164.8,-11
  rectangle net NetD10_2: 984.8,-337 1064.8,-11
  rectangle net NetD9_2: 884.8,-337 964.8,-11
  rectangle net NetPBATT_2: 784.8,-337 864.8,-11
  rectangle: 14,16 170.82,515
  rectangle net NetPBATT_2: 684.8,-337 764.8,-11
  region net NetD9_2: 675.79,97.05 675.79,127.05 685.79,117.05 695.79,127.05 705.79,117.05 715.79,127.05 725.79,117.05 735.79,127.05 735.79,97.05 705.79,78.9
  region net NetD10_2: 735.79,167.05 735.79,137.05 725.79,147.05 715.79,137.05 705.79,147.05 695.79,137.05 685.79,147.05 675.79,137.05 675.79,167.05 705.79,185.2
  text "v. 3.0." at 2293,106 h60 r90
Bottom Layer:
  rectangle net NetPBATT_2: 685,-337 765,-11
  rectangle net NetPBATT_2: 785,-337 865,-11
  rectangle net NetD9_2: 885,-337 965,-11
  rectangle net NetD10_2: 985,-337 1065,-11
  rectangle net GND: 1085,-337 1165,-11
  rectangle net GND: 1185,-337 1265,-11
  rectangle: 1285,-337 1365,-11
  rectangle: 1385,-337 1465,-11
  rectangle net TP: 1485,-337 1565,-11
  rectangle: 1585,-337 1665,-11
  rectangle: 14,16 170.82,515
  region: 2348.2,515 2191.38,515 2191.38,16 2348.2,16
Multi-Layer:
  pour cut-out: 1458,2 1538,2 1538,540 1458,540
  pour cut-out: 1458,678 1538,678 1538,867 1458,867
  pour cut-out: 1513.92,238.66 1513.92,33.66 2007.74,35.24 2007.74,236.02

## Silkscreen, mask and mechanical layers (free items; w line width, h text height)
Top Overlay:
  lines w7.87: 2225,1278 2225,1478
Top Solder:
  region: 740.79,111.98 740.79,151.98 670.79,151.98 670.79,111.98
Mechanical 1:
  lines w4: 1609.13,220.59 1908.46,220.59 ; 1609.25,220.59 1609.25,55.12 1908.58,55.12 1908.58,220.59 ; 0,0 2362.2,0 2362.2,1496.06 0,1496.06 0,0
Mechanical 13:
  rectangle: 0,0 196.85,515
  region: 2362.2,515 2165.35,515 2165.35,0 2362.2,0
  lines w3.94: 670.35,93.31 670.35,167.05 741.22,167.05 741.22,93.31 670.35,93.31
  text "--> This is antenna, not PCB" at 1598.43,1669.29 h60
Mechanical 15:
  lines w3.94: 661.42,188.98 700.79,188.98 ; 681.1,169.29 681.1,208.66 ; 643.7,150.24 643.7,203.01 643.7,223.98 718.5,223.98 718.5,150.24 699.8,150.24 643.7,150.24

## Dimensions
0,0 to 0,1496.06 on Mechanical 13
0,1496.06 to 845.67,1739.17 on Mechanical 13

## Text inside footprints (layer, text, board x,y; h text height)
Uesp: Mechanical 13 "ANTENNA" at 963.78,1591.54 h39.37